# Altium PCB Triacs.PcbDoc
Units mil, origin at the board's own origin, x right, y up, seen from the top; angles counter-clockwise.
Board outline 2500 x 4000 mil, 2 copper layers (Top Layer, Bottom Layer); 33 components, 33 nets, 112 pads, 0 vias.
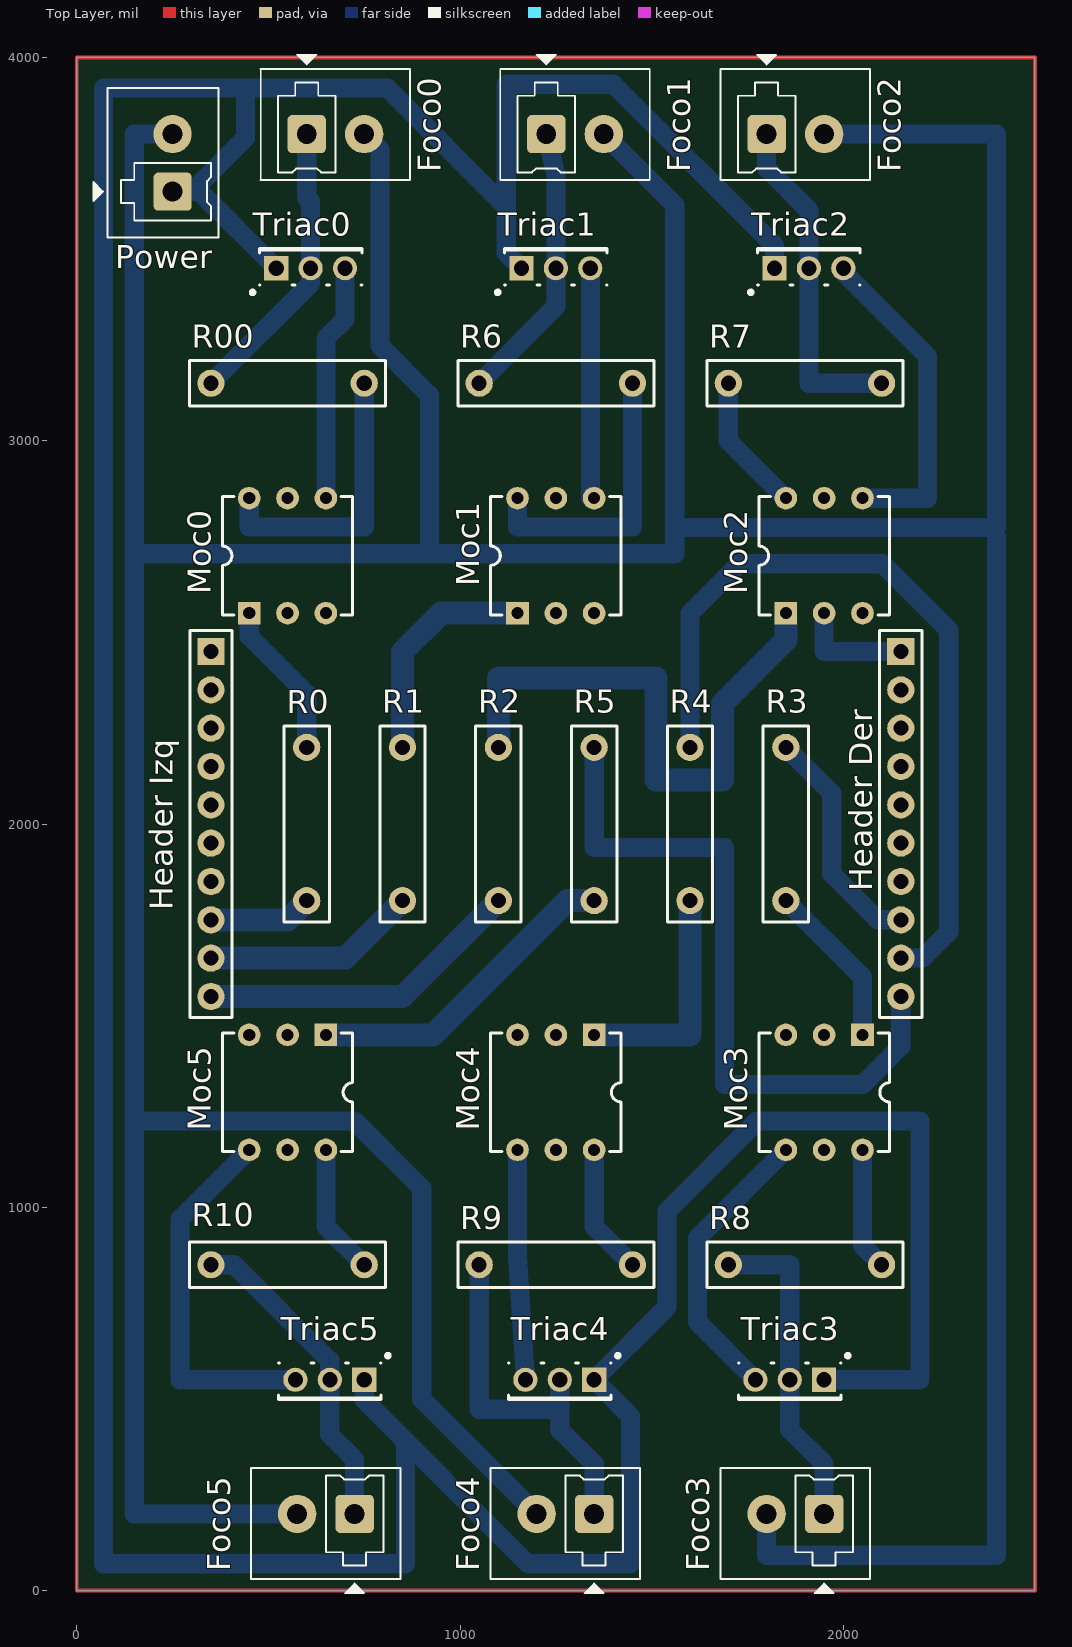
[diagram p0: Top Layer view]
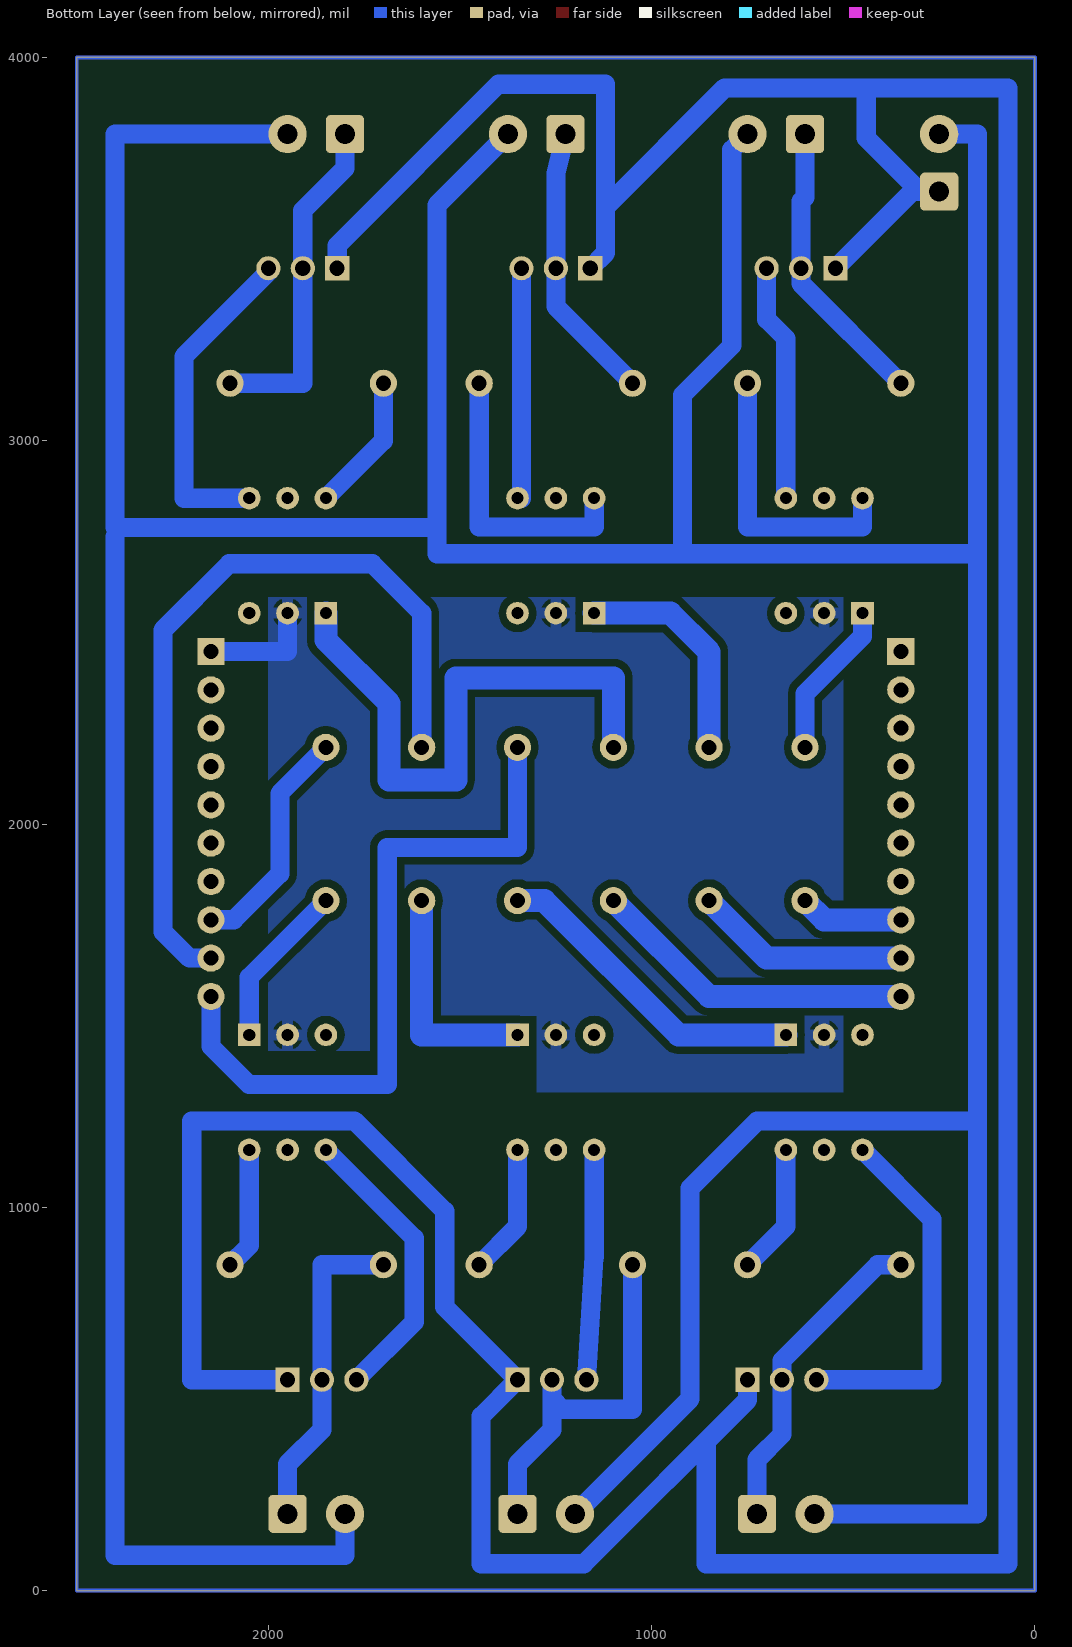
[diagram p1: Bottom Layer view, seen from below]
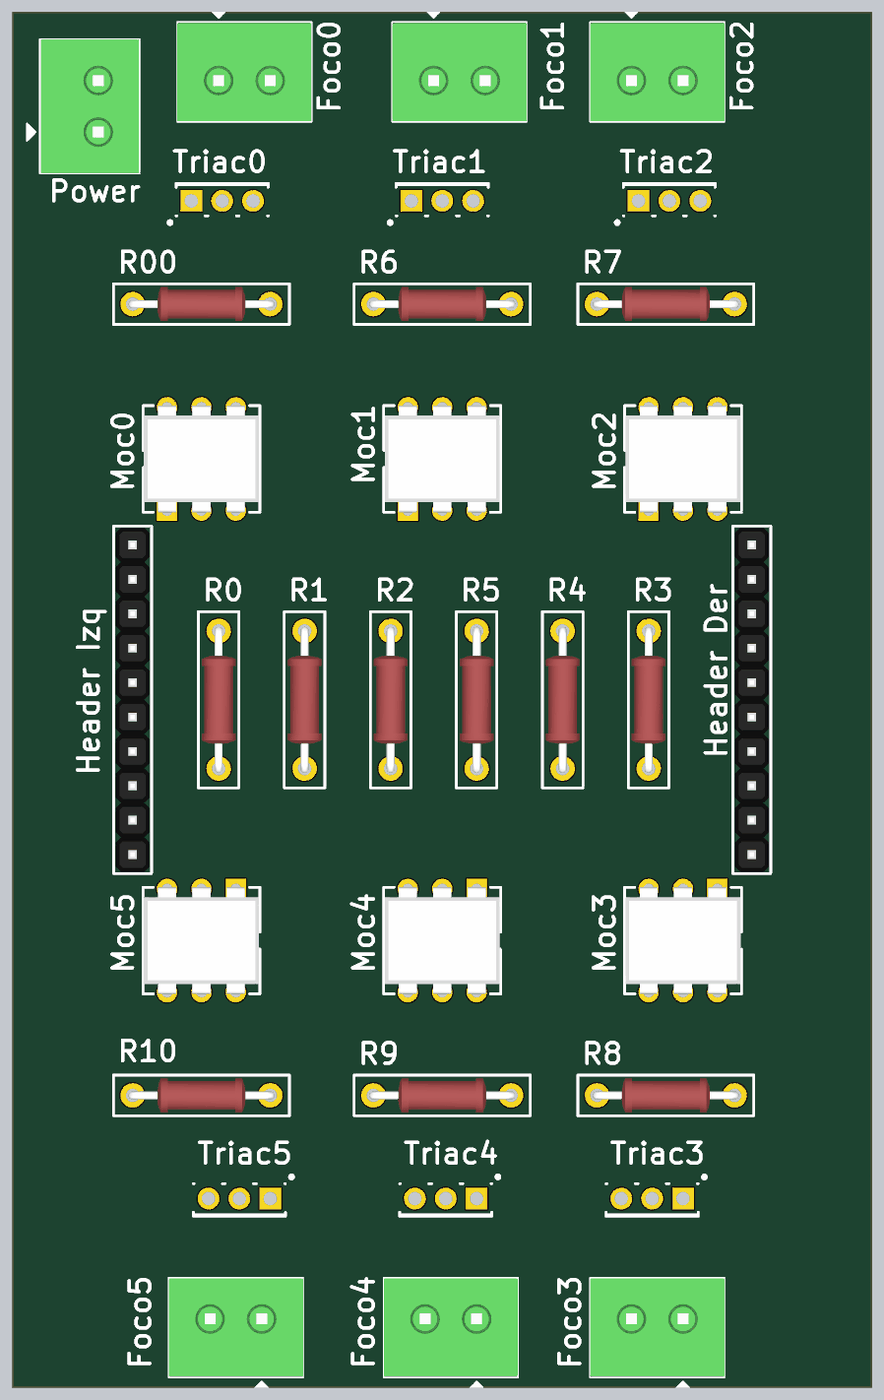
[diagram p2: 3D render of the assembled board from above, using the file's embedded part models]

## Layer stack, top to bottom
Top Solder: solder mask 0.4, Solder Resist, Dk 3.5
Top Layer: signal copper 1.4
Dielectric 1: dielectric 12.6, FR-4, Dk 4.8
Bottom Layer: signal copper 1.4
Bottom Solder: solder mask 0.4, Solder Resist, Dk 3.5

## Board outline
0,0 2500,0 2500,4000 0,4000

## Design rules (kind name [scope] priority, off if disabled: settings)
Clearance Clearance_51 [All] p1: gap=20 ignorepadtopadclearanceinfootprint=FALSE except(0: Arc-Hole Track-Hole SMDPad-Hole THPad-Hole Via-Hole Fill-Hole Poly-Hole Region-Hole Text-Hole)
Clearance Clearance_50 [All] p2: gap=10 ignorepadtopadclearanceinfootprint=FALSE except(0: Arc-Hole Track-Hole SMDPad-Hole THPad-Hole Via-Hole Fill-Hole Poly-Hole Region-Hole Text-Hole)
Clearance Clearance_49 [All] p3: gap=10 ignorepadtopadclearanceinfootprint=FALSE except(0: Arc-Hole Track-Hole SMDPad-Hole THPad-Hole Via-Hole Fill-Hole Poly-Hole Region-Hole Text-Hole)
Clearance Clearance_48 [All] p4: gap=10 ignorepadtopadclearanceinfootprint=FALSE except(0: Arc-Hole Track-Hole SMDPad-Hole THPad-Hole Via-Hole Fill-Hole Poly-Hole Region-Hole Text-Hole)
Clearance Clearance_47 [All] p5: gap=10 ignorepadtopadclearanceinfootprint=FALSE except(0: Arc-Hole Track-Hole SMDPad-Hole THPad-Hole Via-Hole Fill-Hole Poly-Hole Region-Hole Text-Hole)
Clearance Clearance_46 [All] p6: gap=10 ignorepadtopadclearanceinfootprint=FALSE except(0: Arc-Hole Track-Hole SMDPad-Hole THPad-Hole Via-Hole Fill-Hole Poly-Hole Region-Hole Text-Hole)
Clearance Clearance_45 [All] p7: gap=10 ignorepadtopadclearanceinfootprint=FALSE except(0: Arc-Hole Track-Hole SMDPad-Hole THPad-Hole Via-Hole Fill-Hole Poly-Hole Region-Hole Text-Hole)
Clearance Clearance_44 [InNamedPolygon('GND_L02_P012')] p8: gap=10 ignorepadtopadclearanceinfootprint=FALSE except(0: Arc-Hole Track-Hole SMDPad-Hole THPad-Hole Via-Hole Fill-Hole Poly-Hole Region-Hole Text-Hole)
Clearance Clearance_43 [InNamedPolygon('GND_L02_P012')] p9: gap=10 ignorepadtopadclearanceinfootprint=FALSE except(0: Arc-Hole Track-Hole SMDPad-Hole THPad-Hole Via-Hole Fill-Hole Poly-Hole Region-Hole Text-Hole)
Clearance Clearance_42 [InNamedPolygon('GND_L02_P012')] p10: gap=15 ignorepadtopadclearanceinfootprint=FALSE except(0: Arc-Hole Track-Hole SMDPad-Hole THPad-Hole Via-Hole Fill-Hole Poly-Hole Region-Hole Text-Hole)
Clearance Clearance_41 [InNamedPolygon('GND_L02_P012')] p11: gap=10 ignorepadtopadclearanceinfootprint=FALSE except(0: Arc-Hole Track-Hole SMDPad-Hole THPad-Hole Via-Hole Fill-Hole Poly-Hole Region-Hole Text-Hole)
Clearance Clearance_40 [InNamedPolygon('GND_L02_P012')] p12: gap=10 ignorepadtopadclearanceinfootprint=FALSE except(0: Arc-Hole Track-Hole SMDPad-Hole THPad-Hole Via-Hole Fill-Hole Poly-Hole Region-Hole Text-Hole)
Clearance Clearance_39 [InNamedPolygon('GND_L02_P012')] p13: gap=10 ignorepadtopadclearanceinfootprint=FALSE except(0: Arc-Hole Track-Hole SMDPad-Hole THPad-Hole Via-Hole Fill-Hole Poly-Hole Region-Hole Text-Hole)
Clearance Clearance_38 [InNamedPolygon('GND_L02_P012')] p14: gap=10 ignorepadtopadclearanceinfootprint=FALSE except(0: Arc-Hole Track-Hole SMDPad-Hole THPad-Hole Via-Hole Fill-Hole Poly-Hole Region-Hole Text-Hole)
Clearance Clearance_37 [InNamedPolygon('GND_L02_P012')] p15: gap=15 ignorepadtopadclearanceinfootprint=FALSE except(0: Arc-Hole Track-Hole SMDPad-Hole THPad-Hole Via-Hole Fill-Hole Poly-Hole Region-Hole Text-Hole)
Clearance Clearance_36 [InNamedPolygon('Bottom Layer-No Net')] p16: gap=10 ignorepadtopadclearanceinfootprint=FALSE except(0: Arc-Hole Track-Hole SMDPad-Hole THPad-Hole Via-Hole Fill-Hole Poly-Hole Region-Hole Text-Hole)
Clearance Clearance_35 [InNamedPolygon('GND_L02_P012')] p17: gap=10 ignorepadtopadclearanceinfootprint=FALSE except(0: Arc-Hole Track-Hole SMDPad-Hole THPad-Hole Via-Hole Fill-Hole Poly-Hole Region-Hole Text-Hole)
Clearance Clearance_34 [InNamedPolygon('GND_L02_P010')] p18: gap=10 ignorepadtopadclearanceinfootprint=FALSE except(0: Arc-Hole Track-Hole SMDPad-Hole THPad-Hole Via-Hole Fill-Hole Poly-Hole Region-Hole Text-Hole)
Clearance Clearance_33 [InNamedPolygon('GND_L02_P010')] p19: gap=25 ignorepadtopadclearanceinfootprint=FALSE except(0: Arc-Hole Track-Hole SMDPad-Hole THPad-Hole Via-Hole Fill-Hole Poly-Hole Region-Hole Text-Hole)
Clearance Clearance_32 [InNamedPolygon('GND_L02_P010')] p20: gap=25 ignorepadtopadclearanceinfootprint=FALSE except(0: Arc-Hole Track-Hole SMDPad-Hole THPad-Hole Via-Hole Fill-Hole Poly-Hole Region-Hole Text-Hole)
Clearance Clearance_31 [InNamedPolygon('Bottom Layer-No Net')] p21: gap=10 ignorepadtopadclearanceinfootprint=FALSE except(0: Arc-Hole Track-Hole SMDPad-Hole THPad-Hole Via-Hole Fill-Hole Poly-Hole Region-Hole Text-Hole)
Clearance Clearance_30 [InNamedPolygon('GND_L02_P010')] p22: gap=10 ignorepadtopadclearanceinfootprint=FALSE except(0: Arc-Hole Track-Hole SMDPad-Hole THPad-Hole Via-Hole Fill-Hole Poly-Hole Region-Hole Text-Hole)
Clearance Clearance_29 [InNamedPolygon('GND_L02_P010')] p23: gap=10 ignorepadtopadclearanceinfootprint=FALSE except(0: Arc-Hole Track-Hole SMDPad-Hole THPad-Hole Via-Hole Fill-Hole Poly-Hole Region-Hole Text-Hole)
Clearance Clearance_28 [InNamedPolygon('GND_L02_P010')] p24: gap=10 ignorepadtopadclearanceinfootprint=FALSE except(0: Arc-Hole Track-Hole SMDPad-Hole THPad-Hole Via-Hole Fill-Hole Poly-Hole Region-Hole Text-Hole)
Clearance Clearance_27 [InNamedPolygon('GND_L02_P010')] p25: gap=25 ignorepadtopadclearanceinfootprint=FALSE except(0: Arc-Hole Track-Hole SMDPad-Hole THPad-Hole Via-Hole Fill-Hole Poly-Hole Region-Hole Text-Hole)
Clearance Clearance_26 [InNamedPolygon('GND_L02_P010')] p26: gap=10 ignorepadtopadclearanceinfootprint=FALSE except(0: Arc-Hole Track-Hole SMDPad-Hole THPad-Hole Via-Hole Fill-Hole Poly-Hole Region-Hole Text-Hole)
Clearance Clearance_25 [InNamedPolygon('GND_L02_P010')] p27: gap=25 ignorepadtopadclearanceinfootprint=FALSE except(0: Arc-Hole Track-Hole SMDPad-Hole THPad-Hole Via-Hole Fill-Hole Poly-Hole Region-Hole Text-Hole)
Clearance Clearance_24 [InNamedPolygon('GND_L02_P010')] p28: gap=10 ignorepadtopadclearanceinfootprint=FALSE except(0: Arc-Hole Track-Hole SMDPad-Hole THPad-Hole Via-Hole Fill-Hole Poly-Hole Region-Hole Text-Hole)
Clearance Clearance_23 [InNamedPolygon('Bottom Layer-No Net')] p29: gap=10 ignorepadtopadclearanceinfootprint=FALSE except(0: Arc-Hole Track-Hole SMDPad-Hole THPad-Hole Via-Hole Fill-Hole Poly-Hole Region-Hole Text-Hole)
Clearance Clearance_22 [InNamedPolygon('GND_L02_P010')] p30: gap=10 ignorepadtopadclearanceinfootprint=FALSE except(0: Arc-Hole Track-Hole SMDPad-Hole THPad-Hole Via-Hole Fill-Hole Poly-Hole Region-Hole Text-Hole)
Clearance Clearance_21 [InNamedPolygon('GND_L02_P010')] p31: gap=25 ignorepadtopadclearanceinfootprint=FALSE except(0: Arc-Hole Track-Hole SMDPad-Hole THPad-Hole Via-Hole Fill-Hole Poly-Hole Region-Hole Text-Hole)
Clearance Clearance_20 [InNamedPolygon('GND_L02_P010')] p32: gap=25 ignorepadtopadclearanceinfootprint=FALSE except(0: Arc-Hole Track-Hole SMDPad-Hole THPad-Hole Via-Hole Fill-Hole Poly-Hole Region-Hole Text-Hole)
Clearance Clearance_19 [InNamedPolygon('GND_L02_P010')] p33: gap=10 ignorepadtopadclearanceinfootprint=FALSE except(0: Arc-Hole Track-Hole SMDPad-Hole THPad-Hole Via-Hole Fill-Hole Poly-Hole Region-Hole Text-Hole)
Clearance Clearance_18 [InNamedPolygon('GND_L02_P010')] p34: gap=25 ignorepadtopadclearanceinfootprint=FALSE except(0: Arc-Hole Track-Hole SMDPad-Hole THPad-Hole Via-Hole Fill-Hole Poly-Hole Region-Hole Text-Hole)
Clearance Clearance_17 [InNamedPolygon('Bottom Layer-No Net')] p35: gap=20 ignorepadtopadclearanceinfootprint=FALSE except(0: Arc-Hole Track-Hole SMDPad-Hole THPad-Hole Via-Hole Fill-Hole Poly-Hole Region-Hole Text-Hole)
Clearance Clearance_16 [InNamedPolygon('GND_L02_P010')] p36: gap=10 ignorepadtopadclearanceinfootprint=FALSE except(0: Arc-Hole Track-Hole SMDPad-Hole THPad-Hole Via-Hole Fill-Hole Poly-Hole Region-Hole Text-Hole)
Clearance Clearance_15 [InNamedPolygon('GND_L02_P010')] p37: gap=15 ignorepadtopadclearanceinfootprint=FALSE except(0: Arc-Hole Track-Hole SMDPad-Hole THPad-Hole Via-Hole Fill-Hole Poly-Hole Region-Hole Text-Hole)
Clearance Clearance_14 [All] p38: gap=10 ignorepadtopadclearanceinfootprint=FALSE except(0: Arc-Hole Track-Hole SMDPad-Hole THPad-Hole Via-Hole Fill-Hole Poly-Hole Region-Hole Text-Hole)
Clearance Clearance_13 [All] p39: gap=20 ignorepadtopadclearanceinfootprint=FALSE except(0: Arc-Hole Track-Hole SMDPad-Hole THPad-Hole Via-Hole Fill-Hole Poly-Hole Region-Hole Text-Hole)
Clearance Clearance_12 [All] p40: gap=15 ignorepadtopadclearanceinfootprint=FALSE except(0: Arc-Hole Track-Hole SMDPad-Hole THPad-Hole Via-Hole Fill-Hole Poly-Hole Region-Hole Text-Hole)
Clearance Clearance_11 [All] p41: gap=30 ignorepadtopadclearanceinfootprint=FALSE except(0: Arc-Hole Track-Hole SMDPad-Hole THPad-Hole Via-Hole Fill-Hole Poly-Hole Region-Hole Text-Hole)
Clearance Clearance_10 [All] p42: gap=10 ignorepadtopadclearanceinfootprint=FALSE except(0: Arc-Hole Track-Hole SMDPad-Hole THPad-Hole Via-Hole Fill-Hole Poly-Hole Region-Hole Text-Hole)
Clearance Clearance_9 [InNamedPolygon('GND_L02_P010')] p43: gap=30 ignorepadtopadclearanceinfootprint=FALSE except(0: Arc-Hole Track-Hole SMDPad-Hole THPad-Hole Via-Hole Fill-Hole Poly-Hole Region-Hole Text-Hole)
Clearance Clearance_8 [All] p44: gap=10 ignorepadtopadclearanceinfootprint=FALSE except(0: Arc-Hole Track-Hole SMDPad-Hole THPad-Hole Via-Hole Fill-Hole Poly-Hole Region-Hole Text-Hole)
Clearance Clearance_7 [All] p45: gap=40 ignorepadtopadclearanceinfootprint=FALSE except(0: Arc-Hole Track-Hole SMDPad-Hole THPad-Hole Via-Hole Fill-Hole Poly-Hole Region-Hole Text-Hole)
Clearance Clearance_6 [InNamedPolygon('GND_L02_P006')] p46: gap=10 ignorepadtopadclearanceinfootprint=FALSE except(0: Arc-Hole Track-Hole SMDPad-Hole THPad-Hole Via-Hole Fill-Hole Poly-Hole Region-Hole Text-Hole)
Clearance Clearance_5 [InNamedPolygon('GND_L02_P006')] p47: gap=30 ignorepadtopadclearanceinfootprint=FALSE except(0: Arc-Hole Track-Hole SMDPad-Hole THPad-Hole Via-Hole Fill-Hole Poly-Hole Region-Hole Text-Hole)
Clearance Clearance_4 [InNamedPolygon('GND_L02_P004')] p48: gap=10 ignorepadtopadclearanceinfootprint=FALSE except(0: Arc-Hole Track-Hole SMDPad-Hole THPad-Hole Via-Hole Fill-Hole Poly-Hole Region-Hole Text-Hole)
Clearance Clearance_3 [All] p49: gap=25 ignorepadtopadclearanceinfootprint=FALSE except(0: Arc-Hole Track-Hole SMDPad-Hole THPad-Hole Via-Hole Fill-Hole Poly-Hole Region-Hole Text-Hole)
Clearance Clearance_2 [InNamedPolygon('GND')] p50: gap=10 ignorepadtopadclearanceinfootprint=FALSE except(0: Arc-Hole Track-Hole SMDPad-Hole THPad-Hole Via-Hole Fill-Hole Poly-Hole Region-Hole Text-Hole)
Clearance Clearance_1 [InNamedPolygon('GND')] p51: gap=10 ignorepadtopadclearanceinfootprint=FALSE except(0: Arc-Hole Track-Hole SMDPad-Hole THPad-Hole Via-Hole Fill-Hole Poly-Hole Region-Hole Text-Hole)
Clearance [All] p52: gap=10 ignorepadtopadclearanceinfootprint=FALSE except(0: Arc-Hole Track-Hole SMDPad-Hole THPad-Hole Via-Hole Fill-Hole Poly-Hole Region-Hole Text-Hole)
PolygonConnect PolygonConnect_6 [All vs IsNamedPolygon('GND_L02_P012')] p1: connectstyle=Relief reliefconductorwidth=20 reliefentries=4 polygonreliefangle="90 Angle" airgapwidth=10
PolygonConnect PolygonConnect_5 [All vs IsNamedPolygon('GND_L02_P010')] p2: connectstyle=Relief reliefconductorwidth=10 reliefentries=4 polygonreliefangle="90 Angle" airgapwidth=10
PolygonConnect PolygonConnect_4 [All] p3: connectstyle=Relief reliefconductorwidth=30 reliefentries=4 polygonreliefangle="90 Angle" airgapwidth=10
PolygonConnect PolygonConnect_3 [All] p4: connectstyle=Relief reliefconductorwidth=15 reliefentries=4 polygonreliefangle="90 Angle" airgapwidth=10
PolygonConnect PolygonConnect_2 [All vs IsNamedPolygon('GND_L02_P010')] p5: connectstyle=Relief reliefconductorwidth=20 reliefentries=4 polygonreliefangle="90 Angle" airgapwidth=10
PolygonConnect PolygonConnect_1 [All vs IsNamedPolygon('GND_L02_P010')] p6: connectstyle=Relief reliefconductorwidth=20 reliefentries=4 polygonreliefangle="90 Angle" airgapwidth=10
PolygonConnect [All] p7: connectstyle=Relief reliefconductorwidth=10 reliefentries=4 polygonreliefangle="90 Angle" airgapwidth=10
RoutingVias [All] p1: holewidth=28 width=50 viastyle="Through Hole" minholewidth=28 minwidth=50 maxholewidth=28 maxwidth=50
SolderMaskExpansion [All] p1: expansion=4
Width [All] p1: maxlimit=60 minlimit=50 preferedwidth=50
30 further rules are at their usual default settings.

## Components (designator, comment, footprint, x,y, rotation, side; value= is the part's Value field where it differs from the comment)
Foco0 "2P_TERM_BLOCK_HEADER" 2P_PCB_TERM_BLOCK_HDR 675,3800 r90 top
Foco1 "2P_TERM_BLOCK_HEADER" 2P_PCB_TERM_BLOCK_HDR 1300,3800 r90 top
Foco2 "2P_TERM_BLOCK_HEADER" 2P_PCB_TERM_BLOCK_HDR 1875,3800 r90 top
Foco3 "2P_TERM_BLOCK_HEADER" 2P_PCB_TERM_BLOCK_HDR 1875,200 r270 top
Foco4 "2P_TERM_BLOCK_HEADER" 2P_PCB_TERM_BLOCK_HDR 1275,200 r270 top
Foco5 "2P_TERM_BLOCK_HEADER" 2P_PCB_TERM_BLOCK_HDR 650,200 r270 top
"Header Der" "Connector" "1x10x2.54 Pin Header TH V" 2150,2450 r270 top
"Header Izq" "Connector" "1x10x2.54 Pin Header TH V" 350,2450 r270 top
Moc0 "MOC3011" PDIP6-300-W 550,2700 r90 top
Moc1 "MOC3011" PDIP6-300-W 1250,2700 r90 top
Moc2 "MOC3011" PDIP6-300-W 1950,2700 r90 top
Moc3 "MOC3011" PDIP6-300-W 1950,1300 r270 top
Moc4 "MOC3011" PDIP6-300-W 1250,1300 r270 top
Moc5 "MOC3011" PDIP6-300-W 550,1300 r270 top
Power "2P_TERM_BLOCK_HEADER" 2P_PCB_TERM_BLOCK_HDR 250,3725 r180 top
R00 "330R" "R Axial 0.4" 550,3150 r180 top
R0 "330R" "R Axial 0.4" 600,2000 r90 top
R1 "330R" "R Axial 0.4" 850,2000 r90 top
R2 "330R" "R Axial 0.4" 1100,2000 r90 top
R3 "330R" "R Axial 0.4" 1850,2000 r270 top
R4 "330R" "R Axial 0.4" 1600,2000 r270 top
R5 "330R" "R Axial 0.4" 1350,2000 r270 top
R6 "330R" "R Axial 0.4" 1250,3150 r180 top
R7 "330R" "R Axial 0.4" 1900,3150 r0 top
R8 "330R" "R Axial 0.4" 1900,850 r180 top
R9 "330R" "R Axial 0.4" 1250,850 r180 top
R10 "330R" "R Axial 0.4" 550,850 r180 top
Triac0 "Triac" 369-03 610.24,3450 r0 top
Triac1 "Triac" 369-03 1250,3450 r0 top
Triac2 "Triac" 369-03 1910.24,3450 r0 top
Triac3 "Triac" 369-03 1860.24,550 r180 top
Triac4 "Triac" 369-03 1260.24,550 r180 top
Triac5 "Triac" 369-03 660.24,550 r180 top

## Footprints (in the part's own frame and the unit in brackets; to place one, negate y for a bottom-side part, rotate by r counter-clockwise, add the part's x,y. Pads: shape width x height; smd on the part's side, far side on the other; paste and mask are expansions set on the pad)
"1x10x2.54 Pin Header TH V" [mm] "1x10x2.54 Pin Header TH V"
  rect 1.8x1.8 hole 1: 1(0,0)
  round 1.8 hole 1: 2(2.54,0) 3(5.08,0) 4(7.62,0) 5(10.16,0) 6(12.7,0) 7(15.24,0) 8(17.78,0) 9(20.32,0) 10(22.86,0)
  silkscreen extent -1.4,-1.4 24.26,1.4, body extent -1.27,-1.27 24.13,1.27, height 8.55
2P_PCB_TERM_BLOCK_HDR [mil] "TERM BLOCK HDR 2POS 3.81MM"
  rrect25% 100x100 hole 52: 1(0,75)
  round 100 hole 52: 2(0,-75)
  silkscreen extent -120,-195 207,195, body extent -118,-195 167,195, height 362
369-03 [mm] "TO, Thru-Hole, Vertical, Heatsink Mounted; 3 In-Line Leads; Pitch 2.28 mm"
  rect 1.6x1.6 hole 1: 1(-2.28,0)
  round 1.6 hole 1: 2(0,0) 3(2.28,0)
  silkscreen extent -3.97,-1.72 3.4,1.3, body extent -3.45,-1.15 3.45,1.35, height 9.7
PDIP6-300-W [mm] "PDIP6-300 White"
  rect 1.5x1.5 hole 0.8: 1(-3.81,2.54)
  round 1.5 hole 0.8: 2(-3.81,0) 3(-3.81,-2.54) 4(3.81,-2.54) 5(3.81,0) 6(3.81,2.54)
  silkscreen extent -3.94,-4.32 3.94,4.32, body extent -3.93,-4.25 3.94,4.25, height 3.86
"R Axial 0.4" [mm] "Resistor Axial 400 mils"
  round 1.8 hole 1: 1(-5.08,0) 2(5.08,0)
  silkscreen extent -6.5,-1.5 6.5,1.5, body extent -5.38,-1.24 5.38,1.25, height 2.5

## Part data
Foco0 Foco1 Foco2 Foco3 Foco4 Foco5 Power: "Terminal Block THT 2-position header 3.81mm pitch"
"Header Der" "Header Izq": library part "Header 1x10"
Moc0 Moc1 Moc2 Moc3 Moc4 Moc5: library part MOC3041M, "Triac & SCR Output Optocouplers DIP-6 ZERO TRIAC"
R00 R0 R1 R2 R3 R4 R5 R6 R7 R8 R9 R10: library part R, "Resistor, generic"
Triac0 Triac1 Triac2 Triac3 Triac4 Triac5: "Silicon Bidirectional Triode Thyristor"

## Nets (pads, with @x,y where several pads share a name; then routed paths per layer and width w, separated by ;. In a path a pad name is that pad's centre, name@x,y a point inside that pad or via, vN(x,y) a via of type N, cw(c..) or ccw(c..) an arc to the next point about the centre after c; other vN are vias at no path point)
ENT_T: Power.1 Triac0.1 Triac1.1 Triac2.1 Triac3.1 Triac4.1 Triac5.1 | length 12165.6
  Bottom Layer w50: Power.1 320.47,3650 Triac0.1 310.24,3660.24 440,3790 440,3910 ; Triac5.1 750,497 1177,70 1445,70 1445,455 Triac4.1 1540,740 1540,990 1775,1225 2200,1225 2200,550 Triac3.1 ; 857.63,389.37 857.63,70 70,70 70,3920 810,3920 1120.5,3609.5 ; Triac1.1 1120.5,3489.74 1120.5,3609.5 ; Triac2.1 1820.47,3509.53 1400,3930 1120.5,3930 1120.5,3609.5
GND: "Header Der.1" Moc0.2 Moc1.2 Moc2.2 Moc3.2 Moc4.2 Moc5.2 | length 300
  Bottom Layer w50: Moc2.2 1950,2450 2150,2450
NetFoco0_1: Foco0.1 R00.2 Triac0.2 | length 762
  Bottom Layer w50: R00.2 610.24,3410.24 Triac0.2 610.24,3625 600,3635.24 Foco0.1
NetFoco1_1: Foco1.1 R6.2 Triac1.2 | length 735.8
  Bottom Layer w50: R6.2 1250,3350 Triac1.2 1250,3695 Foco1.1
NetFoco2_1: Foco2.1 R7.2 Triac2.2 | length 885.4
  Bottom Layer w50: Foco2.1 1800,3711 1910.24,3600.76 Triac2.2 1910.24,3150 R7.2
NetFoco3_1: Foco3.1 R8.2 Triac3.2 | length 847.4
  Bottom Layer w50: R8.2 1860.24,850 Triac3.2 1860.24,419.76 1950,330 Foco3.1
NetFoco4_1: Foco4.1 R9.2 Triac4.2 | length 985.6
  Bottom Layer w50: R9.2 1050,473 1233.24,473 1260.24,500 ; Triac4.2 1260.24,500 ; Foco4.1 1350,330 1260.24,419.76 1260.24,500
NetFoco5_1: Foco5.1 R10.2 Triac5.2 | length 840.6
  Bottom Layer w50: R10.2 410.24,850 660.24,600 Triac5.2 660.24,406.76 725,342 Foco5.1
"NetHeader Der_8": "Header Der.8" R3.1 | length 609.4
  Bottom Layer w50: R3.1 1970,2080 1970,1870 2090,1750 2150,1750
"NetHeader Der_9": "Header Der.9" R4.1 | length 2090.7
  Bottom Layer w50: R4.1 1600,2550 1729,2679 2102,2679 2275,2506 2275,1719 2206,1650 2150,1650
"NetHeader Der_10": "Header Der.10" R5.1 | length 1851.4
  Bottom Layer w50: R5.1 1350,1939 1690,1939 1690,1320 2050,1320 2150,1420 2150,1550
"NetHeader Izq_8": "Header Izq.8" R0.1 | length 270.7
  Bottom Layer w60: 350,1750 550,1750 R0.1
"NetHeader Izq_9": "Header Izq.9" R1.1 | length 562.1
  Bottom Layer w60: 350,1650 700,1650 R1.1
"NetHeader Izq_10": "Header Izq.10" R2.1 | length 853.6
  Bottom Layer w60: 350,1550 850,1550 R2.1
NetMoc0_1: Moc0.1 R0.2 | length 412.1
  Bottom Layer w50: Moc0.1 450,2490 600,2340 R0.2
NetMoc0_4: Moc0.4 Triac0.3 | length 620.7
  Bottom Layer w50: Moc0.4 650,3267 700,3317 Triac0.3
NetMoc0_6: Moc0.6 R00.1 | length 750
  Bottom Layer w50: Moc0.6 450,2775 750,2775 R00.1
NetMoc1_1: Moc1.1 R1.2 | length 590.9
  Bottom Layer w60: R1.2 850,2449.14 950.86,2550 Moc1.1
NetMoc1_4: Moc1.4 Triac1.3 | length 590
  Bottom Layer w50: Moc1.4@1340,2850 Triac1.3@1340,3440
NetMoc1_6: Moc1.6 R6.1 | length 750
  Bottom Layer w50: Moc1.6 1150,2775 1450,2775 R6.1
NetMoc2_1: Moc2.1 R2.2 | length 1536.1
  Bottom Layer w60: R2.2 1100,2381 1511,2381 1511,2115 1564.18,2115 1564.61,2114.57 1635.39,2114.57 1635.82,2115 1685,2115 1685,2164.18 1685.43,2164.61 1685.43,2235.39 1685,2235.82 1685,2315 1850,2480 Moc2.1
NetMoc2_4: Moc2.4 Triac2.3 | length 861.1
  Bottom Layer w50: Triac2.3 2000,3440 2220,3220 2220,2850 Moc2.4
NetMoc2_6: Moc2.6 R7.1 | length 362.1
  Bottom Layer w50: R7.1 1700,3000 Moc2.6
NetMoc3_1: Moc3.1 R3.2 | length 432.8
  Bottom Layer w50: R3.2 2050,1600 Moc3.1
NetMoc3_4: Moc3.4 Triac3.3 | length 758
  Bottom Layer w50: Triac3.3 1619.57,700.91 1619.57,919.57 Moc3.4
NetMoc3_6: Moc3.6 R8.1 | length 320.7
  Bottom Layer w50: Moc3.6 2050,900 R8.1
NetMoc4_1: Moc4.1 R4.2 | length 600
  Bottom Layer w60: Moc4.1 1600,1450 R4.2
NetMoc4_4: Moc4.4 Triac4.3 | length 600.7
  Bottom Layer w50: Moc4.4 1150,870.47 Triac4.3
NetMoc4_6: Moc4.6 R9.1 | length 341.4
  Bottom Layer w50: Moc4.6 1350,950 R9.1
NetMoc5_1: Moc5.1 R5.2 | length 845
  Bottom Layer w60: Moc5.1 930,1450 1280,1800 R5.2
NetMoc5_4: Moc5.4 Triac5.3 | length 976.4
  Bottom Layer w50: Moc5.4 269,969 269,550 Triac5.3
NetMoc5_6: Moc5.6 R10.1 | length 341.4
  Bottom Layer w50: Moc5.6 650,950 R10.1
SAL_F: Foco0.2 Foco1.2 Foco2.2 Foco3.2 Foco4.2 Foco5.2 Power.2 | length 15350.5
  Bottom Layer w50: 150,1225 724.53,1225 900,1049.53 900,500 Foco4.2 ; 150,2705 920,2705 ; Power.2 150,3800 150,200 Foco5.2 ; Foco0.2 791,3759 791,3248 920,3119 920,2705 ; Foco1.2 1560,3615 1560,2774 ; Foco3.2 1800,92 2400,92 2400,2750 ; Foco2.2 2400,3800 2400,2774 1560,2774 ; 920,2705 1560,2705 1560,2774
pads on no net: "Header Der.2" "Header Der.3" "Header Der.4" "Header Der.5" "Header Der.6" "Header Der.7" "Header Izq.1" "Header Izq.2" "Header Izq.3" "Header Izq.4" "Header Izq.5" "Header Izq.6" "Header Izq.7" Moc0.3 Moc0.5 Moc1.3 Moc1.5 Moc2.3 Moc2.5 Moc3.3 Moc3.5 Moc4.3 Moc4.5 Moc5.3 Moc5.5

## Polygon pours and split planes (outlines as drawn)
GND on Bottom Layer "Bottom Layer-No Net" (solid, remove dead copper, pour order 12): 500,2591 2000,2591 2000,1408 1300,1408 1300,1300 500,1300

## Other copper
Multi-Layer:
  the board outline again, w10

## Dimensions
-125.99,4010.94 to -125.99,10.94 on Bottom Layer
0,0 to 2500,0 on Bottom Layer